# EAGLE board AM-Crystal-RX-LM324 (EAGLE 7.2.0)
Passive Aircraft Receiver using Crystal Detector, LM324 Version http://www.techlib.com/electronics/aircraft.htm http://radio-circuits.blogspot.ch/2011/02/passive-air-band-receiver.html http://www.vk6fh.com/vk6fh/amvhfpassiverx.htm http://www.vk2zay.net/article/127 http://electronics-diy.com/aircraft-transmission-receiver.php
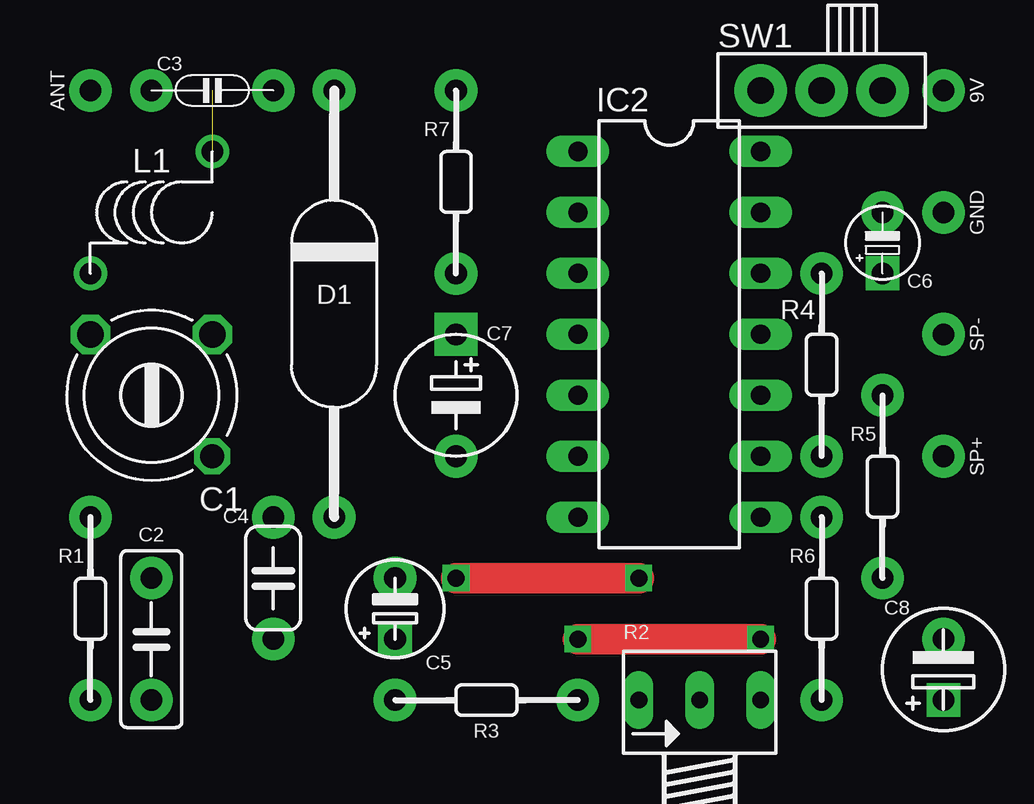
[diagram p0: board, top side]
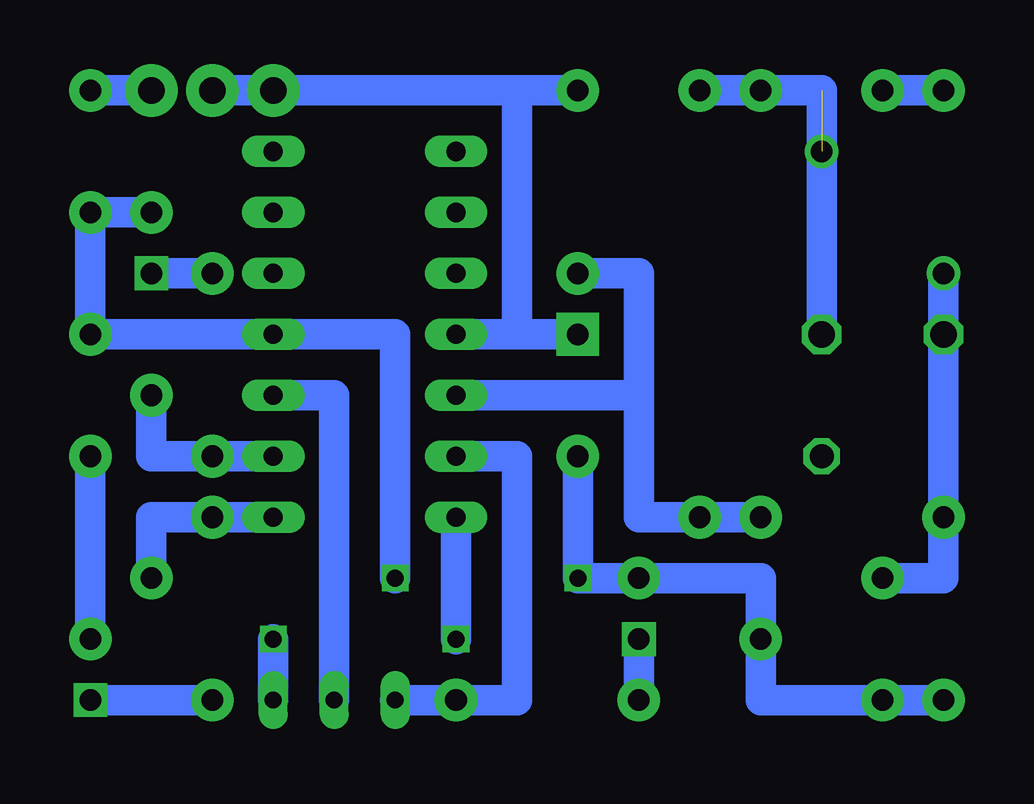
[diagram p1: board, bottom side, seen from below]

No outline drawn. Coordinates in mm, seen from the top.
Copper layers (1*16): Top 0.035mm / dielectric 1.5mm / Bottom 0.035mm
Design rules "default": minimum track width 10mil, minimum drill 24mil, track to track 8mil, track to pad 8mil, pad to pad 8mil, via to via 8mil, smd to smd 8mil, copper to edge 40mil, drill to drill 8mil, minimum pad ring 10mil, minimum via ring 8mil, stop-mask expansion 4mil, vias tented up to drill 0mil, thermal gap 10mil

## Footprints (pad centres in the part's own frame; a part is rotated, then mirrored left to right if it is on the bottom)
SPAD = drill 0.9 pad 1.778: 1 0,0
TRIM808-45 = drill 1.1 octagon: 1 2.54,-2.54; 2 -2.54,-2.54 | drill 1 octagon: 3 -2.54,2.54
C050-025X075/V = drill 0.9 pad 1.778: 1 0,2.54; 2 0,-2.54
C050-020X036 = drill 0.9 pad 1.778: 1 -2.54,0; 2 2.54,0
C050-024X044/V = drill 0.9 pad 1.778: 1 0,2.54; 2 0,-2.54
E2.5-4/V = drill 0.9 square: + 0,1.27 | drill 0.9 pad 1.778: - 0,-1.27
E2,5-3/V = drill 0.9 square: + 0,1.27 | drill 0.9 pad 1.778: - 0,-1.27
E5-5/V = drill 0.9 pad 1.778 square: + 0,2.54 | drill 0.9 pad 1.778: - 0,-2.54
E2,5-5/V = drill 0.9 square: + 0,-1.27 | drill 0.9 pad 1.778: - 0,1.27
OA79-18/V = drill 0.9 pad 1.778: A 0,-8.89; C 0,8.89
DIL14 = drill 0.8 long: 1 -3.81,7.62; 2 -3.81,5.08; 3 -3.81,2.54; 4 -3.81,0; 5 -3.81,-2.54; 6 -3.81,-5.08; 7 -3.81,-7.62; 8 3.81,-7.62; 9 3.81,-5.08; 10 3.81,-2.54; 11 3.81,0; 12 3.81,2.54; 13 3.81,5.08; 14 3.81,7.62
L-04-5/5 = drill 0.9: 1 -2.54,-2.54; 2 2.54,2.54
0202/7-V = drill 0.9 pad 1.778: 1 0,3.81; 2 0,-3.81
B64Y = drill 0.7 long: A 2.54,0; E -2.54,0; S 0,0
0202/7 = drill 0.9 pad 1.778: 1 -3.81,0; 2 3.81,0
SLSW-1P2T-H = drill 1.1 pad 2.184: O 2.54,0; P 0,0; S -2.54,0

## Placement (x,y rotation side)
9V  BAT+  [SPAD]  38.1,27.94 180 top
ANT  ANT  [SPAD]  2.54,27.94 0 top
C1  5-18pF  [TRIM808-45]  5.08,15.24 180 top
C2  10nF  [C050-025X075/V]  5.08,5.08 0 top
C3  1.5pF  [C050-020X036]  7.62,27.94 0 top
C4  330pF  [C050-024X044/V]  10.16,7.62 0 top
C5  1μF  [E2.5-4/V]  15.24,6.35 180 top
C6  1μF  [E2,5-3/V]  35.56,21.59 180 top
C7  100μF  [E5-5/V]  17.78,15.24 0 top
C8  100μF  [E2,5-5/V]  38.1,3.81 0 top
D1  OA79  [OA79-18/V]  12.7,19.05 0 top
GND  BAT-  [SPAD]  38.1,22.86 180 top
IC2  LM324  [DIL14]  26.67,17.78 0 top
L1  0.15μH  [L-04-5/5]  5.08,22.86 0 top
R1  1MΩ  [0202/7-V]  2.54,6.35 0 top
R2  100kΩ  [B64Y]  27.94,2.54 0 top
R3  3.3kΩ  [0202/7]  19.05,2.54 180 top
R4  3.3kΩ  [0202/7-V]  33.02,16.51 180 top
R5  100kΩ  [0202/7-V]  35.56,11.43 0 top
R6  100Ω  [0202/7-V]  33.02,6.35 0 top
R7  1MΩ  [0202/7-V]  17.78,24.13 0 top
SP+  SPKR+  [SPAD]  38.1,12.7 180 top
SP-  SPKR-  [SPAD]  38.1,17.78 180 top
SW1  SL-SW-1P-2T-H  [SLSW-1P2T-H]  33.02,27.94 0 top

## Library data of the parts
9V ANT GND SP+ SP- = pad
C1 = cap-trim
C2-C8 = c
D1 = d
IC2 = ic
L1 R1-R7 = r
SW1 = sw

## Nets
A: IC2.7 R2.A
E: IC2.6 R2.E R3.1
GND: C2.2 C4.2 C5.- C6.- C7.- GND.1 IC2.11 R1.2 SP-.1
N$1: C4.1 D1.A IC2.5 R7.2
N$2: C7.+ IC2.4 R7.1 SW1.P
N$3: C1.1 C2.1 L1.1 R1.1
N$5: C1.2 C3.2 D1.C L1.2
N$6: ANT.1 C3.1
N$9: IC2.8 R5.2 R6.1
N$10: IC2.9 R4.1 R5.1
N$11: C5.+ R3.2
N$12: C6.+ R4.2
N$13: C8.+ R6.2
N$14: C8.- SP+.1
N$15: 9V.1 SW1.O
S: IC2.10 R2.S

## Tracks (layer width: path | path; a pad name or v marks a point on that pad's centre or on a via)
A  (via drill 0.7)
  Top 1.27: v22.86,5.08 v30.48,5.08
  Bottom 1.27: IC2.7 v22.86,5.08 | R2.A v30.48,5.08
E
  Bottom 1.27: IC2.6 20.32,12.7 20.32,2.54 R3.1 R2.E
GND  (via drill 0.7)
  Top 1.27: v17.78,7.62 v25.4,7.62
  Bottom 1.27: C6.- GND.1 SP-.1 IC2.11 25.4,17.78 v25.4,7.62 | C7.- v17.78,7.62 C5.- | R1.2 C2.2 10.16,2.54 C4.2 10.16,7.62 C5.- | C5.- 12.7,7.62
N$1
  Bottom 1.27: 15.24,15.24 IC2.5 | 15.24,15.24 15.24,20.32 R7.2 | 15.24,15.24 15.24,10.16 D1.A C4.1
N$2
  Bottom 1.27: IC2.4 C7.+ 20.32,17.78 20.32,27.94 | 20.32,27.94 SW1.P | 20.32,27.94 R7.1
N$3
  Bottom 1.27: L1.1 C1.1 R1.1 2.54,7.62 C2.1
N$5  (1 unrouted)
  Bottom 1.27: D1.C C3.2 7.62,27.94 C1.2
N$6
  Bottom 1.27: C3.1 ANT.1
N$9
  Bottom 1.27: R5.2 35.56,10.16 R6.1 IC2.8
N$10
  Bottom 1.27: R5.1 35.56,12.7 R4.1 IC2.9
N$11
  Bottom 1.27: R3.2 C5.+
N$12
  Bottom 1.27: R4.2 C6.+
N$13
  Bottom 1.27: R6.2 C8.+
N$14
  Bottom 1.27: SP+.1 C8.-
N$15
  Bottom 1.27: SW1.O 9V.1
S
  Bottom 1.27: IC2.10 27.94,15.24 R2.S

## Text on the board
Dimension: 1 | 2 | 3 | 4 | 5 | 6 | 7 | 8 | 9 | 10 | 11 | 12 | 13 | 14 | 15
Measures: 11 | 10 | 9 | 8 | 7 | 6 | 5 | 4 | 3 | 2 | 1